# Altium PCB ADTPCB.PcbDoc (part 2 of 2)
Units mil, origin at the board's own origin, x right, y up, seen from the top; angles counter-clockwise.
Board outline 2950 x 1935 mil, 2 copper layers (Top Layer, Bottom Layer); 87 components, 120 nets, 430 pads, 109 vias.
Unrouted connection lines stored in the file: 3.
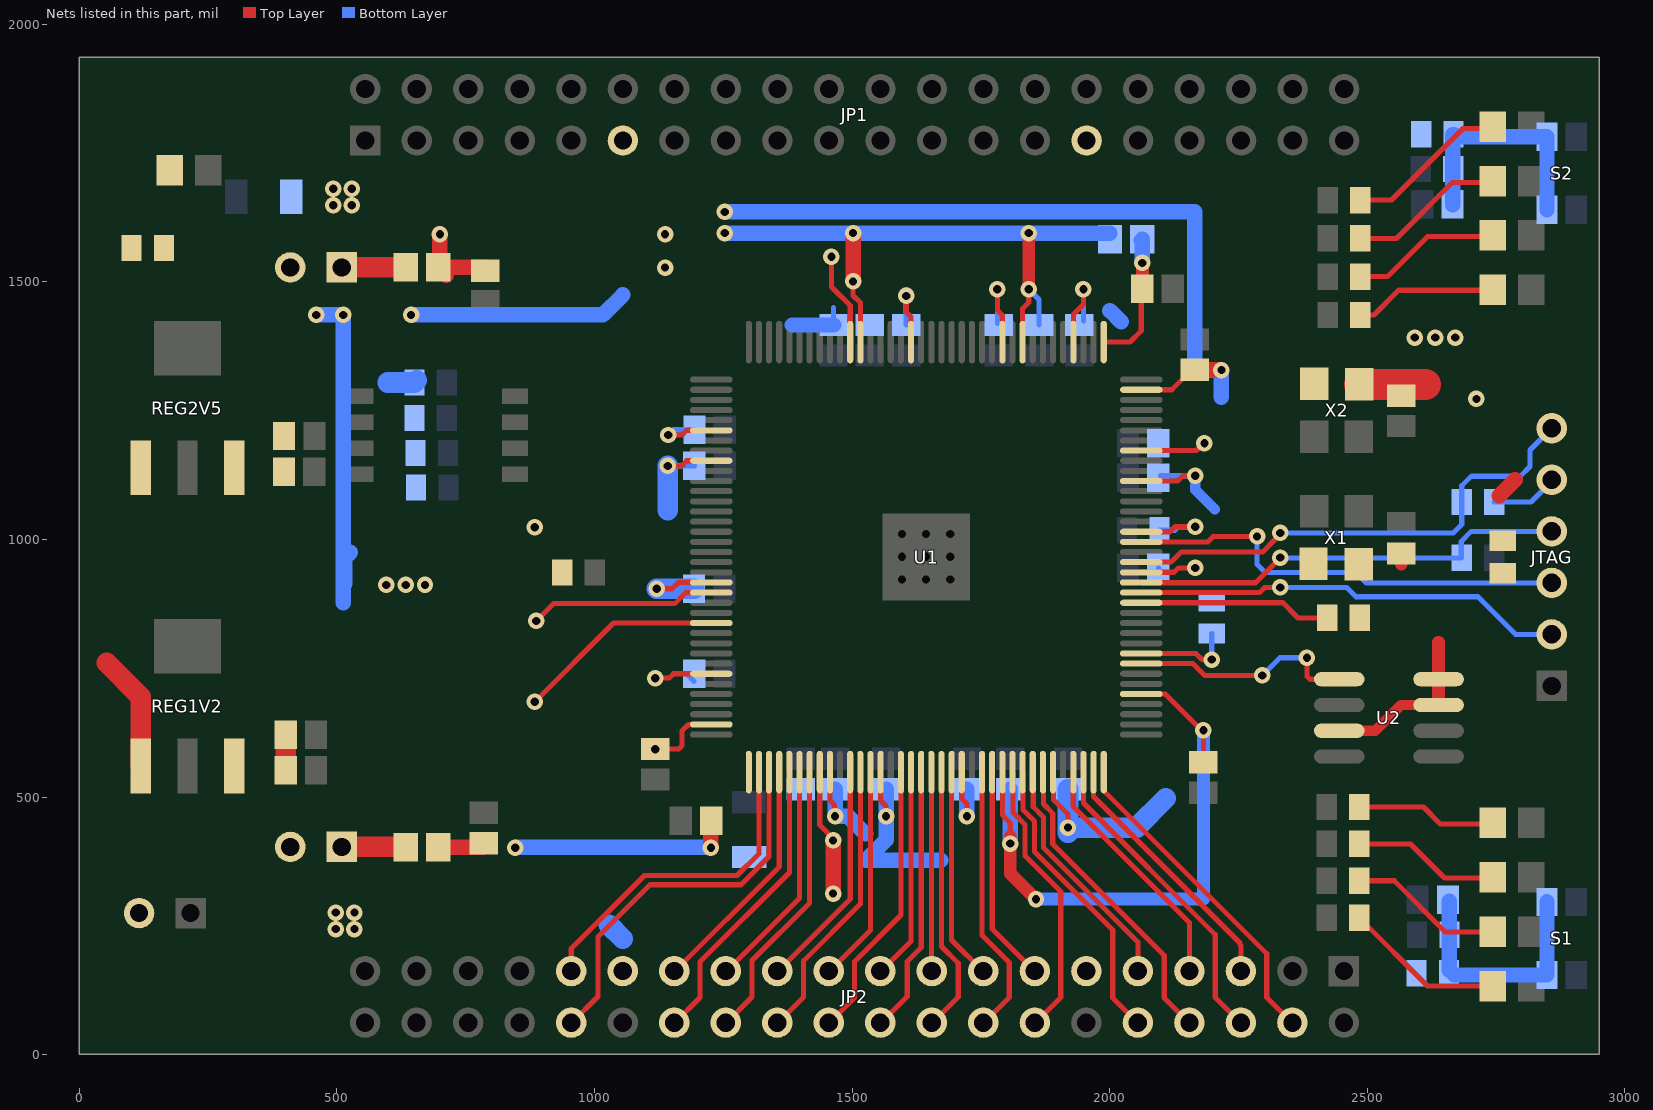
[diagram p2: the nets of this part, all layers, seen from the top]

## Via types
v1: diameter 32, hole 16, Top Layer to Bottom Layer, 105 vias
v2: diameter 50, hole 28, Top Layer to Bottom Layer, 4 vias

## Nets (pads, with @x,y where several pads share a name; then routed paths per layer and width w, separated by ;. In a path a pad name is that pad's centre, name@x,y a point inside that pad or via, vN(x,y) a via of type N, cw(c..) or ccw(c..) an arc to the next point about the centre after c; other vN are vias at no path point) (continued)
IO110: JP2.31 U1.110 | length 644
  Top Layer w10: JP2.31@955,160.91 955,205.91 1096.87,347.78 1276.87,347.78 1319.2,390.1 U1.110@1319.2,548.58
IO111: JP2.32 U1.111 | length 749.9
  Top Layer w10: JP2.32@955,60.91 1007,112.91 1007,228.91 1108,329.91 1284.28,329.91 1338.88,384.51 U1.111@1338.88,548.58
IO112: JP2.27 U1.112 | length 472
  Top Layer w10: JP2.27@1155,160.91 1358.57,364.47 U1.112@1358.57,548.58
IO113: JP2.28 U1.113 | length 580.2
  Top Layer w10: JP2.28@1155,60.91 1205,110.91 1205,180.27 1378.25,353.52 U1.113@1378.25,548.58
IO114: JP2.25 U1.114 | length 446.9
  Top Layer w10: JP2.25@1255,160.91 1397.94,303.84 U1.114@1397.94,548.58
IO115: JP2.26 U1.115 | length 555
  Top Layer w10: JP2.26@1255,60.91 1306,111.91 1306,182.84 1417.62,294.46 U1.115@1417.62,548.58
IO119: JP2.23 U1.119 | length 446.2
  Top Layer w10: JP2.23@1355,160.91 1496.36,302.27 U1.119@1496.36,548.58
IO120: JP2.24 U1.120 | length 554.4
  Top Layer w10: JP2.24@1355,60.91 1406,111.91 1406,182.45 1516.05,292.5 U1.120@1516.05,548.58
IO121: JP2.21 U1.121 | length 421.1
  Top Layer w10: JP2.21@1455,160.91 1535.73,241.64 U1.121@1535.73,548.58
IO124: JP2.22 U1.124 | length 545.7
  Top Layer w10: JP2.22@1455,60.91 1505,110.91 1505,181.06 1594.87,270.93 1594.87,548.5 U1.124@1594.79,548.58
IO125: JP2.19 U1.125 | length 412.3
  Top Layer w10: JP2.19@1555,160.91 1614.47,220.38 U1.125@1614.47,548.58
IO126: JP2.20 U1.126 | length 520.5
  Top Layer w10: JP2.20@1555,60.91 1607,112.91 1607,180.69 1634.16,207.85 U1.126@1634.16,548.58
IO127: JP2.17 U1.127 | length 388.2
  Top Layer w10: U1.127@1653.84,548.58 1653.84,162.06 JP2.17@1655,160.91
IO128: JP2.18 U1.128 | length 522.3
  Top Layer w10: JP2.18@1655,60.91 1706,111.91 1706,177.73 1673.53,210.2 U1.128@1673.53,548.58
IO129: JP2.15 U1.129 | length 413.3
  Top Layer w10: U1.129@1693.21,548.58 1693.21,222.69 JP2.15@1755,160.91
IO132: JP2.16 U1.132 | length 530.2
  Top Layer w10: U1.132@1752.27,548.58 1752.27,231.86 1805,179.13 1805,110.91 JP2.16@1755,60.91
IO133: JP2.13 U1.133 | length 422.1
  Top Layer w10: U1.133@1771.95,548.58 1771.95,243.95 JP2.13@1855,160.91
IO135: JP2.14 U1.135 | length 547.2
  Top Layer w10: U1.135@1811.32,548.58 1812.23,547.68 1812.23,469.95 1835.87,446.31 1835.87,386.03 1905,316.91 1905,110.91 JP2.14@1855,60.91
IO136: JP2.10 U1.136 | length 580.5
  Top Layer w10: U1.136@1831.01,548.58 1831.91,547.68 1831.91,475.55 1853.75,453.71 1853.75,394.44 2006,242.18 2006,109.91 JP2.10@2055,60.91
IO137: JP2.9 U1.137 | length 472.3
  Top Layer w10: U1.137@1850.69,548.58 1851.6,547.68 1851.6,481.14 1871.62,461.12 1871.62,401.84 2055,218.46 JP2.9@2055,160.91
IO138: JP2.8 U1.138 | length 605.6
  Top Layer w10: U1.138@1870.38,548.58 1871.28,547.68 1871.28,486.73 1889.5,468.52 1889.5,409.24 2106,192.74 2106,109.91 JP2.8@2155,60.91
IO141: JP2.7 U1.141 | length 481.1
  Top Layer w10: U1.141@1929.43,548.58 1929.43,481.75 2155,256.18 JP2.7@2155,160.91
IO142: JP2.6 U1.142 | length 614.4
  Top Layer w10: U1.142@1949.12,548.58 1949.12,488.79 2205,232.91 2205,110.91 JP2.6@2255,60.91
IO143: JP2.5 U1.143 | length 506.2
  Top Layer w10: U1.143@1968.8,548.58 1968.8,501.1 2253,216.91 2253,212.91 2255,210.91 JP2.5@2255,160.91
IO144: JP2.4 U1.144 | length 639.5
  Top Layer w10: U1.144@1988.49,548.58 1988.49,512.42 2305,195.91 2305,110.91 JP2.4@2355,60.91
MSEL0: C31.2 C32.2 C38.2 JTAG.5 L1.2 R9.1 R10.1 U1.35 U1.94 U1.97 U1.107 | length 2770.9
  Top Layer w10: v1(884,684.91) 1037.05,837.95 U1.97@1226.68,837.95 ; v1(887,841.91) 920.61,875.51 1155.61,875.51 1177.1,897.01 U1.94@1226.68,897.01 ; C32.2@1118,593.43 1163.53,593.43 1170,599.91 1170,628.91 1182.2,641.1 U1.107@1226.68,641.1 ; U1.35@2061.32,1290.71 2120.58,1290.71 C31.2@2165,1335.13
  Top Layer w30: v1@700,1593.91 700,1531.73 L1.2@696.5,1528.23 ; L1.2@711.87,1512.85 L1.2@696.5,1528.23 ; C38.2@787.8,1528.23 L1.2@696.5,1528.23 ; C31.2@2165,1329.38 v1@2216.53,1329.38 ; 2756,1084.91 2787,1115.91
  Bottom Layer w10: R9.1@2746.5,1072.91 2818,1072.91 2861,1115.91 JTAG.5@2858,1115.91
  Bottom Layer w30: v1(1253,1635.91) 2165,1635.91 2165,1328.91 v1(2217,1328.91) 2217,1275.91
  other v1: 1118,592.91 596,911.91 633.5,911.91 671,911.91 2712,1272.91 700,1592.78 1137,1592.78
NCSO: U1.8 U2.1 | length 446.3
  Top Layer w10: U1.8@2061.32,759.21 2161.42,759.21 2184.41,736.22 v1(2296.26,736.22) ; v1(2382.87,770.67) 2382.87,734.76 2388.73,728.91 U2.1@2445.54,728.91
  Bottom Layer w10: v1(2296.26,736.22) 2330.71,770.67 v1(2382.87,770.67)
Net1V2_2: 1V2.2 C2.2 C3.2 REG1V2.3 | length 69
  Top Layer w40: C3.2@400.47,551.91 C2.2@400.47,620.91
Net2V5_2: 2V5.2 C35.2 C36.2 REG2V5.3
NetC5_2: C5.2 R20.2 R24.2 S1.1 | length 455.9
  Bottom Layer w30: R20.2@2659.53,163.91 C5.2@2659.53,297.94 ; R20.2@2668.68,154.75 S1.1@2848.82,154.75 S1.1@2848.82,296.48
NetC6_2: C6.2 R21.2 R25.2 S2.1 | length 464.9
  Bottom Layer w30: C6.2@2665.53,1649.91 2665.53,1785.91 2667.5,1785.91 2667.5,1782.06 S2.1@2848.82,1782.06 S2.1@2848.82,1640.33
NetD0_1: D0.1 R14.2 | length 292.9
  Top Layer w10: R14.2@2484.5,265.91 2616.78,133.63 D0.1@2722.6,133.63
NetD1_1: D1.1 R13.2 | length 279.2
  Top Layer w10: R13.2@2484.5,337.57 2552.33,337.57 2651.47,238.43 D1.1@2722.6,238.43
NetD2_1: D2.1 R12.2 | length 265.4
  Top Layer w10: R12.2@2484.5,409.24 2583.67,409.24 2649.66,343.24 D2.1@2722.6,343.24
NetD3_1: D3.1 R11.2 | length 251.7
  Top Layer w10: R11.2@2484.5,480.91 2609,480.91 2641.86,448.05 D3.1@2722.6,448.05
NetD4_1: D4.1 R18.2 | length 275.9
  Top Layer w10: R18.2@2486.5,1435.91 2513,1435.91 2560.86,1483.76 D4.1@2742.6,1483.76
NetD5_1: D5.1 R17.2 | length 288.5
  Top Layer w10: R17.2@2486.5,1510.24 2539.33,1510.24 2617.5,1588.4 D5.1@2742.6,1588.4
NetD6_1: D6.1 R16.2 | length 301
  Top Layer w10: R16.2@2486.5,1584.57 2556.67,1584.57 2665.14,1693.04 D6.1@2742.6,1693.04
NetD7_1: D7.1 R15.2 | length 313.6
  Top Layer w10: R15.2@2486.5,1658.91 2547,1658.91 2685.78,1797.69 D7.1@2742.6,1797.69
NetD8_1: D8.1 R2.2
NetR6_2: R6.2 U1.9 | length 192.1
  Top Layer w10: U1.9@2061.32,778.9 2167.01,778.9 2179,766.91 v1(2198,766.91)
  Bottom Layer w10: v1(2198,766.91) R6.2@2198,817.41
NetR7_2: R7.2 U1.14 | length 373.4
  Top Layer w10: U1.14@2061.32,877.32 2336.26,877.32 2365.68,847.91 R7.2@2422.5,847.91
NetR8_2: R8.2 U1.21 | length 181.1
  Top Layer w10: U1.21@2061.32,1015.12 2117.21,1015.12 2127,1024.91 v1(2166,1024.91)
  Bottom Layer w10: R8.2@2096.5,1017.91 2127,1017.91 2134,1024.91 v1(2166,1024.91)
TCK: JTAG.4 R5.1 U1.16 | length 848.8
  Top Layer w10: U1.16@2061.32,916.69 2061.98,916.03 2283.13,916.03 v1@2322,954.91
  Bottom Layer w10: v1@2331,953.91 2341,963.91 2682.5,963.91 2682.5,996.41 2702,1015.91 JTAG.4@2858,1015.91
  other v1: 2331,964.91
TDI: JTAG.2 R10.2 U1.15 | length 838.5
  Top Layer w10: U1.15@2061.32,897.01 2291.1,897.01 2301,906.91 v1(2331,906.91)
  Bottom Layer w10: v1(2331,906.91) 2460,906.91 2478,888.91 2715,888.91 2788,815.91 JTAG.2@2858,815.91
TDO: JTAG.3 U1.20 | length 869.9
  Top Layer w10: U1.20@2061.32,995.43 2190.53,995.43 2201,1005.91 v1(2286,1005.91)
  Bottom Layer w10: v1(2286,1005.91) 2286,951.91 2302.13,935.78 2478.4,935.78 2498.28,915.91 JTAG.3@2858,915.91
TMS: JTAG.6 R9.2 U1.18 | length 951.6
  Top Layer w10: U1.18@2061.32,956.06 2119.16,956.06 2139,975.91 2297,975.91 2321,999.91
  Bottom Layer w10: v1(2331,1012.91) 2667,1012.91 2683.5,1029.41 2683.5,1104.41 2702,1122.91 2797,1122.91 2816,1141.91 2816,1173.91 JTAG.6@2858,1215.91
VCC1P2: 1V2.1 C1.2 C10.2 C11.2 C12.2 C13.2 C14.2 C15.2 C16.2 C17.2 L2.1 L3.1 U1.5 U1.29 U1.45 U1.61 U1.78 U1.102 U1.116 U1.134 | length 4388.7
  Top Layer w10: v1(1118,730.91) 1145,730.91 1153.62,739.53 U1.102@1226.68,739.53 ; v1(1143,1202.91) 1170,1202.91 1179.06,1211.97 U1.78@1226.68,1211.97 ; U1.116@1437.31,548.58 1437.13,548.4 1437.13,445.78 v1@1467,415.91 ; v1(1502,1500.91) 1502,1473.91 1516.05,1459.86 U1.61@1516.05,1383.23 ; U1.134@1791.64,548.58 1791.64,465.27 1807,449.91 v1@1807,423.91 ; U1.45@1831.01,1383.23 1831.01,1447.91 1843,1459.91 v1(1843,1485.91) ; U1.5@2061.32,700.16 2107.75,700.16 2182,625.91 C13.2@2182,586.43 ; U1.29@2061.32,1172.6 2168.69,1172.6 v1@2184,1187.91
  Top Layer w25: v1@1807,423.91 1807,351.91 v1(1857,301.91) ; v1(1843,1485.91) v1(1843,1594.91)
  Top Layer w30: v1(1463,312.91) v1(1463,415.91) ; v1(1502,1500.91) v1(1502,1594.91)
  Top Layer w40: 1V2.1@509.53,403.31 L2.1@633.1,403.31
  Bottom Layer w10: v1(1143,1202.91) 1153.3,1213.21 C17.2@1194.07,1213.21 ; C16.2@1178.65,739.53 C16.2@1193.27,724.91 ; v1(1843,1485.91) 1863,1465.91 C11.2@1863,1416.43
  Bottom Layer w25: v1(1857,301.91) 2182,301.91 v1(2182,629.91)
  Bottom Layer w30: v1(460,1435.91) v1(512.36,1435.91) 512.36,876.91 ; 515,913.78 515,963.91 526,974.91 ; v1(644,1435.91) 1016,1435.91 1055,1474.91 ; v1@1258,1594.91 v1(1502,1594.91) v1(1843,1594.91) L3.1@2000.5,1594.91 ; v1(1807,409.91) C14.2@1807,515.38 ; 2000.5,1444.4 2022.13,1422.78
  other v1: 2184,1186.91 1137,1527.91 1253,1594.91
VCC2P5: 2V5.1 L1.1 | length 124
  Top Layer w40: 2V5.1@509.53,1528.23 L1.1@633.5,1528.23
VCC3P3: 3V3.2 C18.2 C19.2 C20.2 C21.2 C22.2 C23.2 C24.2 C25.2 C26.2 C27.2 C28.2 C29.2 C30.2 C37.2 C40.2 JP1.11 JP1.29 JP2.11 JP2.29 R1.1 R2.1 R6.1 R7.1 R20.1 R21.1 R28.1 R29.1 R30.1 R31.1 REG1V2.1 REG2V5.1 U1.17 U1.26 U1.40 U1.47 U1.56 U1.62 U1.81 U1.93 U1.117 U1.122 U1.130 U1.139 U2.3 U2.7 U2.8 X1.1 X1.4 X2.1 X2.4 | length 3566.1
  Top Layer w10: v1(1120.7,904.61) 1150.7,904.61 1162.79,916.69 U1.93@1226.68,916.69 ; v1(1142,1142.91) 1169,1142.91 1179.01,1152.91 U1.81@1226.68,1152.91 ; U1.117@1456.99,548.58 1456.99,493.91 1466,484.91 v1@1466,462.91 ; v1(1460,1548.91) v1@1465,1548.91 ; U1.62@1496.36,1383.23 1496.36,1454.04 1460,1490.4 1460,1543.91 v1@1465,1548.91 ; U1.122@1555.42,548.58 1555.42,493.49 1566,482.91 v1@1566,463.91 ; v1(1605,1472.91) 1605,1441.91 1614.47,1432.43 U1.56@1614.47,1383.23 ; U1.130@1712.9,548.58 1712.9,497.01 1723,486.91 v1(1723,462.91) ; v1(1782,1485.91) 1782,1444.91 1791.64,1435.27 U1.47@1791.64,1383.23 ; U1.139@1890.06,548.58 1890.97,547.68 1890.97,494.94 1919,466.91 v1(1919,440.91) ; U1.40@1929.43,1383.23 1929.44,1436.73 1949,1456.29 v1(1949,1485.91) ; U1.17@2061.32,936.38 2124.75,936.38 2133.28,944.91 v1(2166,944.91) v1@2167,944.91 ; U1.26@2061.32,1113.54 2131.64,1113.54 2142,1123.91 v1(2166,1123.91) ; v1@1465,1548.91 1469,1552.91 1469,1548.91 v1@1465,1548.91
  Top Layer w20: U2.3@2445.54,628.91 2515.72,628.91 2565.72,678.91 U2.7@2638.46,678.91
  Top Layer w25: v1(884,1023.91) v1@884.5,1023.4 ; C37.2@2566,952.13 C37.2@2566,972.72 ; U2.7@2638.46,678.91 U2.8@2638.46,728.91 2638.46,800.52
  Top Layer w40: 53,760.91 119.45,694.46 REG1V2.1@119.45,560.39
  Top Layer w60: X2.4@2484.61,1301.04 2612.87,1301.04
  Bottom Layer w10: v1(1142,1142.91) 1142.31,1143.21 C30.2@1193.75,1143.21 ; C19.2@1464,1416.43 1464,1449.91 ; C20.2@1605,1416.43 v1(1605,1472.91) ; C21.2@1782,1419.43 v1(1782,1485.91) ; C22.2@1949,1424.43 v1(1949,1485.91) ; C24.2@2094.53,944.91 C24.2@2095.5,943.93 ; C23.2@2098.53,1123.91 v1(2166,1123.91) ; v1(2166,944.91) v1@2167,944.91
  Bottom Layer w20: v1(2166,1123.91) 2166,1096.91 2204,1058.91
  Bottom Layer w30: 1384,1416.43 C19.2@1464,1416.43 ; C28.2@1467,515.38 v1(1467,462.91) 1492,462.91 1526.13,428.78 ; C27.2@1566,515.38 v1(1566,462.91) 1566,416.91 1526.13,377.03 1672.13,377.03 ; v1(1605,1472.91) v1@1605,1475.47 ; v1(1723,462.91) C26.2@1723,515.38
  Bottom Layer w40: 599,1304.91 R31.1@650.5,1304.91 R31.1@654.87,1309.28 ; 1028,251.91 1055,224.91 ; v1(1120.7,904.61) C29.2@1193.17,904.61 ; 1142,1056.51 v1(1142,1142.91) ; v1@1919,430.91 v1(1919,440.91) ; C25.2@1919,515.38 v1(1919,440.91) ; 2109,497.91 2052,440.91 v1(1919,440.91)
  other v1: 498,243.91 534,243.91 498,275.91 534,275.91 2592,1391.91 2632,1391.91 2671,1391.91 493,1648.91 529,1648.91 493,1680.91 529,1680.91
VCCD_PLL: C34.2 C39.2 L2.2 U1.109 | length 519.3
  Top Layer w30: L2.2@696.5,402.91 C39.2@784.47,402.91 ; v1(1226,401.91) 1226,445.23 1226.68,445.91 C34.2@1231.68,440.91
  Bottom Layer w30: v1@846,402.91 v1@1226,402.91
  other v1: 846,401.91
VCCD_PLL2: C33.2 L3.2 U1.37 | length 262.7
  Top Layer w10: U1.37@1988.49,1383.23 2039.32,1383.23 2061.32,1405.23 C33.2@2061.32,1486.91
  Top Layer w25: C33.2@2063.5,1486.91 v1@2063.5,1536.41
  Bottom Layer w30: L3.2@2061,1580.41 L3.2@2063.5,1582.91 v1@2063.5,1536.91
  other v1: 2063,1536.91

## Polygon pours and split planes (outlines as drawn)
GND on Top Layer "GND-poly" (solid, remove dead copper, pour order 13): 2940,1922.24 2940,14.76 2450.79,14.76 2450.79,1922.24
no net on Top Layer "NONET_L01_P021" (solid, pour order 21): 2720.47,667.32
VCCD_PLL on Top Layer "BAT-poly" (solid, pour order 20): 669,323.91 834,323.91 909,398.91 909,434.91 669,434.91
MSEL0 on Top Layer "VCCA2-poly" (solid, pour order 16): 669,1634.91 776,1634.91 821,1589.78 906,1504.91 906,1494.91 669,1494.91
VCC3P3 on Top Layer "BAT-poly" (solid, pour order 17): 865,902.91 865,1057.91 962,1057.91 962,902.91
VCC3P3 on Top Layer "BAT-poly" (solid, pour order 19): 278,311.91 713,311.91 584,211.91 278,211.91
VCC3P3 on Top Layer "BAT-poly" (solid, pour order 14): 373,1590.91 373,1723.91 572,1723.91 661,1634.91 661,1590.91
MSEL0 on Top Layer "Top Layer-No Net" (solid, pour order 12): 1269.68,1611.22 1269.68,1718.5 1115.16,1718.5 1118.11,1718.5 1118.11,1572.83 1188.98,1572.83 1197.83,1572.83 1197.83,1611.22
VCCD_PLL on Top Layer "Top Layer-No Net" (solid, pour order 15): 1306.1,590.55 1306.1,377.95 1237.99,377.95 1201.77,377.95 1201.77,379.92 1201.77,590.55 1205.22,590.55
GND on Bottom Layer "GND-poly" (solid, remove dead copper, pour order 18): 13.78,14.76 13.78,1922.24 2940,1922.24 2940,14.76
MSEL0 on Bottom Layer "VCCA-poly" (solid, pour order 11): 554,937.91 969,937.91 969,653.91 554,653.91

## Keep-outs
Keep-Out Layer:
  lines w10: 0,1.6 0,1936.02 2953,1936.02 2953,1.6 0,1.6

## Other copper
Top Layer:
  region net TDI: 2908,862.91 2731,862.91 2731,767.91 2908,767.91
  region net TDI: 2816,957.91 2731,957.91 2731,767.91 2816,767.91
  region net MSEL0: 2909,1159.91 2727,1159.91 2727,1069.91 2909,1069.91
  region net MSEL0: 2814,1295.91 2731,1295.91 2731,972.91 2814,972.91
  region net MSEL0: 2814,1295.91 2696,1295.91 2696,1236.91 2814,1236.91
  region net VCC3P3: 2719,1228.91 2609,1228.91 2609,886.91 2719,886.91
  region net GND: 560,1398.91 434,1398.91 434,442.91 560,442.91
  rectangle net GND: 2451,1006.21 2598,1090.91
  rectangle net VCC3P3: 2363.9,900.91 2688,998.31
  rectangle net GND: 2097,1361.91 2236,1520.91
  rectangle net GND: 1083,377.95 1194,559.91
  region net VCC3P3: 2688,1374.91 2354,1374.91 2354,1253.91 2688,1253.91
  region net VCC3P3: 2688,1414.91 2575,1414.91 2575,1253.91 2688,1253.91
  region net GND: 2598,1244.91 2534,1244.91 2534,1090.91 2598,1090.91
  region net VCC3P3: 159,715.91 13.78,715.91 13.78,14.76 159,14.76
  region net VCC3P3: 125,1922.24 13.78,1922.24 13.78,14.76 125,14.76
  region net VCC3P3: 505,211.91 13.78,211.91 13.78,14.76 505,14.76
  region net NetD8_1: 210,1760.91 139,1760.91 139,1535.91 210,1535.91
  region net VCC3P3: 504,1922.24 13.78,1922.24 13.78,1774.91 504,1774.91
  region net VCC3P3: 165,1295.91 13.78,1295.91 13.78,864.91 165,864.91
  region net GND: 362,1760.91 225,1760.91 225,1264.91 362,1264.91
  region net GND: 294,1521.91 139,1521.91 139,1312.91 294,1312.91
  region net Net2V5_2: 418,1242.91 275,1242.91 275,1058.91 418,1058.91
  region net Net2V5_2: 420,1576.91 373,1576.91 373,1058.91 420,1058.91
  region net Net2V5_2: 454,1576.91 373,1576.91 373,1472.91 454,1472.91
  region net GND: 595,1398.91 434,1398.91 434,1075.91 595,1075.91
  region net GND: 264,1313.91 183,1313.91 183,738.91 264,738.91
  region net GND: 264,845.91 182,845.91 182,224.91 264,224.91
  region net VCC3P3: 505,311.91 278,311.91 278,14.76 505,14.76
  region net Net1V2_2: 423,715.91 277,715.91 277,323.91 423,323.91
  region net Net1V2_2: 451,434.91 277,434.91 277,323.91 451,323.91
  region net GND: 554,1045.91 183,1045.91 183,738.91 554,738.91
  region net VCC2P5: 661,1576.91 472,1576.91 472,1472.91 661,1472.91
  region net MSEL0: 821,1576.91 669,1576.91 669,1494.91 821,1494.91
  region net MSEL0: 747,1634.91 669,1634.91 669,1384.91 747,1384.91
  region net VCC1P2: 661,1460.91 434,1460.91 434,1409.91 661,1409.91
  region net VCC1P2: 659,434.91 464,434.91 464,323.91 659,323.91
  region net GND: 560,1045.91 433,1045.91 433,515.91 560,515.91
  region net GND: 820,868.91 433,868.91 433,442.91 820,442.91
  region net GND: 855,1057.91 706,1057.91 706,442.91 855,442.91
  region net MSEL0: 697,1060.91 571,1060.91 571,877.91 697,877.91
  region net MSEL0: 696,1398.91 604,1398.91 604,877.91 696,877.91
  region net MSEL0: 747,1460.91 670,1460.91 670,1369.91 747,1369.91
  region net GND: 743,1360.91 706,1360.91 706,878.91 743,878.91
  region net GND: 906,1486.91 757,1486.91 757,1339.91 906,1339.91
  region net GND: 822,1360.91 721,1360.91 721,1339.91 822,1339.91
  region net VCC3P3: 504,1922.24 373,1922.24 373,1590.91 504,1590.91
  region net GND: 909,638.91 828,638.91 828,442.91 909,442.91
  region net VCC3P3: 2688,1414.91 2609,1414.91 2609,886.91 2688,886.91
  region net VCC3P3: 2669,998.31 2461,998.31 2461,785.91 2669,785.91
  rectangle net MSEL0: 1118.11,1572.83 1188.98,1650.59
  rectangle net MSEL0: 1118.11,1620.08 1253,1650.59
  rectangle net VCC1P2: 1118.11,1381.89 1269.68,1563.98
  rectangle net VCC1P2: 1197.83,1499.02 1269.68,1611.22
  rectangle net GND: 1288.39,608.27 2004.92,1322.83
Bottom Layer:
  region net VCC3P3: 2001,1816.91 1907,1816.91 1907,1660.91 2001,1660.91
  region net VCC3P3: 1110.24,1814.91 1004,1814.91 1004,1620.91 1110.24,1620.91
  region net VCC3P3: 2546,277.91 2497,277.91 2497,121.91 2546,121.91
  region net VCC3P3: 2619,198.91 2497,198.91 2497,121.91 2619,121.91
  region net VCC3P3: 2007,277.91 1904,277.91 1904,110.91 2007,110.91
  region net VCC3P3: 1109,277.91 1006,277.91 1006,110.91 1109,110.91
  region net VCC3P3: 583,306.91 460,306.91 460,202.91 583,202.91
  region net VCC3P3: 2546,277.91 460,277.91 460,202.91 2546,202.91
  region net VCC3P3: 2129,976.91 2073,976.91 2073,325.91 2129,325.91
  region net VCC3P3: 1434,390.91 1367,390.91 1367,232.91 1434,232.91
  region net VCC3P3: 1711,390.91 1367,390.91 1367,343.91 1711,343.91
  region net VCC1P2: 1359,432.91 1257,432.91 1257,291.91 1359,291.91
  region net VCC1P2: 1300,377.91 591,377.91 591,291.91 1300,291.91
  region net VCC1P2: 1481,432.91 1300,432.91 1300,398.91 1481,398.91
  region net VCC1P2: 1431,536.91 1368,536.91 1368,398.91 1431,398.91
  region net VCC3P3: 2129,536.91 1848,536.91 1848,325.91 2129,325.91
  region net VCC3P3: 1941,382.91 1775,382.91 1775,325.91 1941,325.91
  region net VCC3P3: 1832,382.91 1775,382.91 1775,231.91 1832,231.91
  region net VCC1P2: 1766,334.91 1442,334.91 1442,291.91 1766,291.91
  region net VCC1P2: 1766,430.91 1720,430.91 1720,291.91 1766,291.91
  region net VCC1P2: 1838,536.91 1777,536.91 1777,390.91 1838,390.91
  region net VCC1P2: 1827,430.91 1720,430.91 1720,390.91 1827,390.91
  region net VCC3P3: 1711,443.91 1490,443.91 1490,343.91 1711,343.91
  region net VCC3P3: 1763,536.91 1439,536.91 1439,440.91 1763,440.91
  rectangle net GND: 1227,548.91 2061,1382.91
  region net VCC1P2: 543,1460.91 434,1460.91 434,877.91 543,877.91
  region net VCC1P2: 759,564.91 460,564.91 460,315.91 759,315.91
  region net VCC1P2: 616,520.91 360,520.91 360,448.91 616,448.91
  region net VCC1P2: 543,1460.91 360,1460.91 360,448.91 543,448.91
  region net GND: 1244,560.91 771,560.91 771,425.91 1244,425.91
  region net GND: 1244,686.91 1160,686.91 1160,425.91 1244,425.91
  region net MSEL0: 1146,686.91 1086,686.91 1086,568.91 1146,568.91
  region net GND: 1076,644.91 771,644.91 771,425.91 1076,425.91
  region net MSEL0: 1146,700.91 554,700.91 554,653.91 1146,653.91
  region net MSEL0: 969,937.91 554,937.91 554,874.91 969,874.91
  region net VCC1P2: 1216,774.91 977,774.91 977,710.91 1216,710.91
  region net VCC1P2: 1033,986.91 360,986.91 360,947.91 1033,947.91
  region net VCC1P2: 1033,986.91 977,986.91 977,710.91 1033,710.91
  region net VCC3P3: 1216,1173.91 1044,1173.91 1044,790.91 1216,790.91
  region net VCC3P3: 1216,1064.91 554,1064.91 554,995.91 1216,995.91
  region net VCC3P3: 673,1411.91 554,1411.91 554,995.91 673,995.91
  region net VCC3P3: 1211,1171.91 820,1171.91 820,995.91 1211,995.91
  region net VCC3P3: 619,1709.91 553,1709.91 553,995.91 619,995.91
  region net VCC3P3: 591,1701.91 360,1701.91 360,1580.91 591,1580.91
  region net VCC3P3: 1228,1709.91 360,1709.91 360,1620.91 1228,1620.91
  region net VCC3P3: 2536,1709.91 1058,1709.91 1058,1660.91 2536,1660.91
  region net VCC3P3: 1228,1709.91 1164,1709.91 1164,1392.91 1228,1392.91
  region net VCC3P3: 1495,1464.91 1164,1464.91 1164,1392.91 1495,1392.91
  region net MSEL0: 1156,1612.91 669,1612.91 669,1572.91 1156,1572.91
  region net VCC3P3: 661,1709.91 553,1709.91 553,1572.91 661,1572.91
  region net VCC1P2: 1156,1562.91 627,1562.91 627,1419.91 1156,1419.91
  region net VCC1P2: 1215,1382.91 820,1382.91 820,1181.91 1215,1181.91
  region net VCC1P2: 1156,1562.91 820,1562.91 820,1181.91 1156,1181.91
  region net VCC3P3: 1472,1568.91 1164,1568.91 1164,1392.91 1472,1392.91
  region net VCC3P3: 1815,1568.91 1571,1568.91 1571,1392.91 1815,1392.91
  region net VCC3P3: 1968,1568.91 1901,1568.91 1901,1392.91 1968,1392.91
  region net VCC3P3: 1968,1568.91 1571,1568.91 1571,1511.91 1968,1511.91
  region net VCC1P2: 1892,1502.91 1823,1502.91 1823,1393.91 1892,1393.91
  region net VCC1P2: 1563,1518.91 1510,1518.91 1510,1392.91 1563,1392.91
  region net GND: 1352,670.91 1244,670.91 1244,440.91 1352,440.91
  region net VCC3P3: 1968,1568.91 1164,1568.91 1164,1527.91 1968,1527.91
  region net VCC1P2: 1563,1519.91 1482,1519.91 1482,1474.91 1563,1474.91
  region net VCC1P2: 2028,1611.91 1977,1611.91 1977,1392.91 2028,1392.91
  region net VCC1P2: 2133,1512.91 1977,1512.91 1977,1392.91 2133,1392.91
  region net VCC1P2: 2133,1447.91 2073,1447.91 2073,1159.91 2133,1159.91
  region net VCC1P2: 2216,1216.91 2073,1216.91 2073,1159.91 2216,1159.91
  region net VCC3P3: 2205,1149.91 2073,1149.91 2073,1057.91 2205,1057.91
  region net VCC1P2: 821,416.91 591,416.91 591,291.91 821,291.91
  region net VCCD_PLL2: 2133,1611.91 2037,1611.91 2037,1520.91 2133,1520.91
  region net GND: 2435,1648.91 2190,1648.91 2190,1362.91 2435,1362.91
  region net MSEL0: 2239,1348.91 2150,1348.91 2150,1252.91 2239,1252.91
  region net MSEL0: 2181,1648.91 2150,1648.91 2150,1259.91 2181,1259.91
  region net VCC1P2: 2028,1611.91 1236,1611.91 1236,1576.91 2028,1576.91
  region net GND: 2435,1648.91 2247,1648.91 2247,1300.91 2435,1300.91
  region net GND: 2935,1361.91 2247,1361.91 2247,1300.91 2935,1300.91
  region net VCC3P3: 2536,1709.91 2447,1709.91 2447,1369.91 2536,1369.91
  region net VCC3P3: 2688,1414.91 2447,1414.91 2447,1369.91 2688,1369.91
  region net VCC3P3: 2536,1817.91 2496,1817.91 2496,1369.91 2536,1369.91
  region net VCC3P3: 2629,1817.91 2496,1817.91 2496,1752.91 2629,1752.91
  region net VCC1P2: 2201,651.91 2140,651.91 2140,289.91 2201,289.91
  region net VCC3P3: 2216,1149.91 2190,1149.91 2190,855.91 2216,855.91
  region net VCC3P3: 2216,974.91 2079,974.91 2079,855.91 2216,855.91
  region net MSEL0: 2731,1292.91 2150,1292.91 2150,1252.91 2731,1252.91

## Silkscreen, mask and mechanical layers (free items; w line width, h text height)
Top Overlay:
  text "+" at 1036,1659.91 h60
  text "+" at 1933,1659.91 h60
  text "+ -" at 80.5,340.41 h60
  text "+" at 1936,216.91 h60
  text "+" at 1038,213.91 h60
Bottom Overlay:
  lines w5: 92.18,816.32 92.18,771.05 92.18,761.69 92.18,712.05 114,742.64 139.81,742.64 ; 96.33,836.66 cw(c163.37,812.39) 167.29,883.58 cw(c165.44,814.74) 234.28,812.88 234.29,738.69 ; 114.9,764.8 140.17,749.82 140.17,684.58 92.81,660.23 92.81,611.84 120.54,637.13 276.97,717.36 161.9,775.01 ; 124.9,799.15 124.9,815.61 cw(c163.63,816.54) 162.7,855.27 cw(c163.44,816.83) 201.87,817.57 201.87,775.42 ; 202.19,775.11 121.79,775.11 92.18,730.78 92.18,778.86 92.18,799.15 92.18,842.23 121.16,799.15 202.19,799.15 ; 234.28,764.18 234.28,770.74 ; 234.59,775.11 245.5,775.11 245.5,733.23 ; 234.59,799.15 245.5,799.15 245.5,838.79 245.5,841.6 218.65,868.45 269.18,868.45 269.18,721.32 ; 159.8,694.57 203.74,717.36 159.8,739.84 159.8,694.57
  text "fixed version" at 196,1018.21 h40 r270
  text "Jose Pinilla" at 125.2,1016.21 h40 r270

## Dimensions
2953,1.6 to 2953,1936.02 on Mechanical 13
2953,1936.02 to 0,1936.02 on Mechanical 13
2455.12,1774.48 to 2454.72,162.28 on Mechanical 13

## Text inside footprints (layer, text, board x,y; h text height)
JP1: Top Overlay "1" at 475.12,1724.48 h30; Top Overlay "2" at 470.12,1894.48 h30; Top Overlay "40" at 2515.12,1889.48 h30; Top Overlay "39" at 2515.12,1724.48 h30
JP2: Top Overlay "1" at 2527.22,182.28 h30; Top Overlay "2" at 2522.22,17.28 h30; Top Overlay "40" at 437.22,17.28 h30; Top Overlay "39" at 442.22,182.28 h30